# EAGLE board Controle_4_reles V2 (EAGLE 4.09)
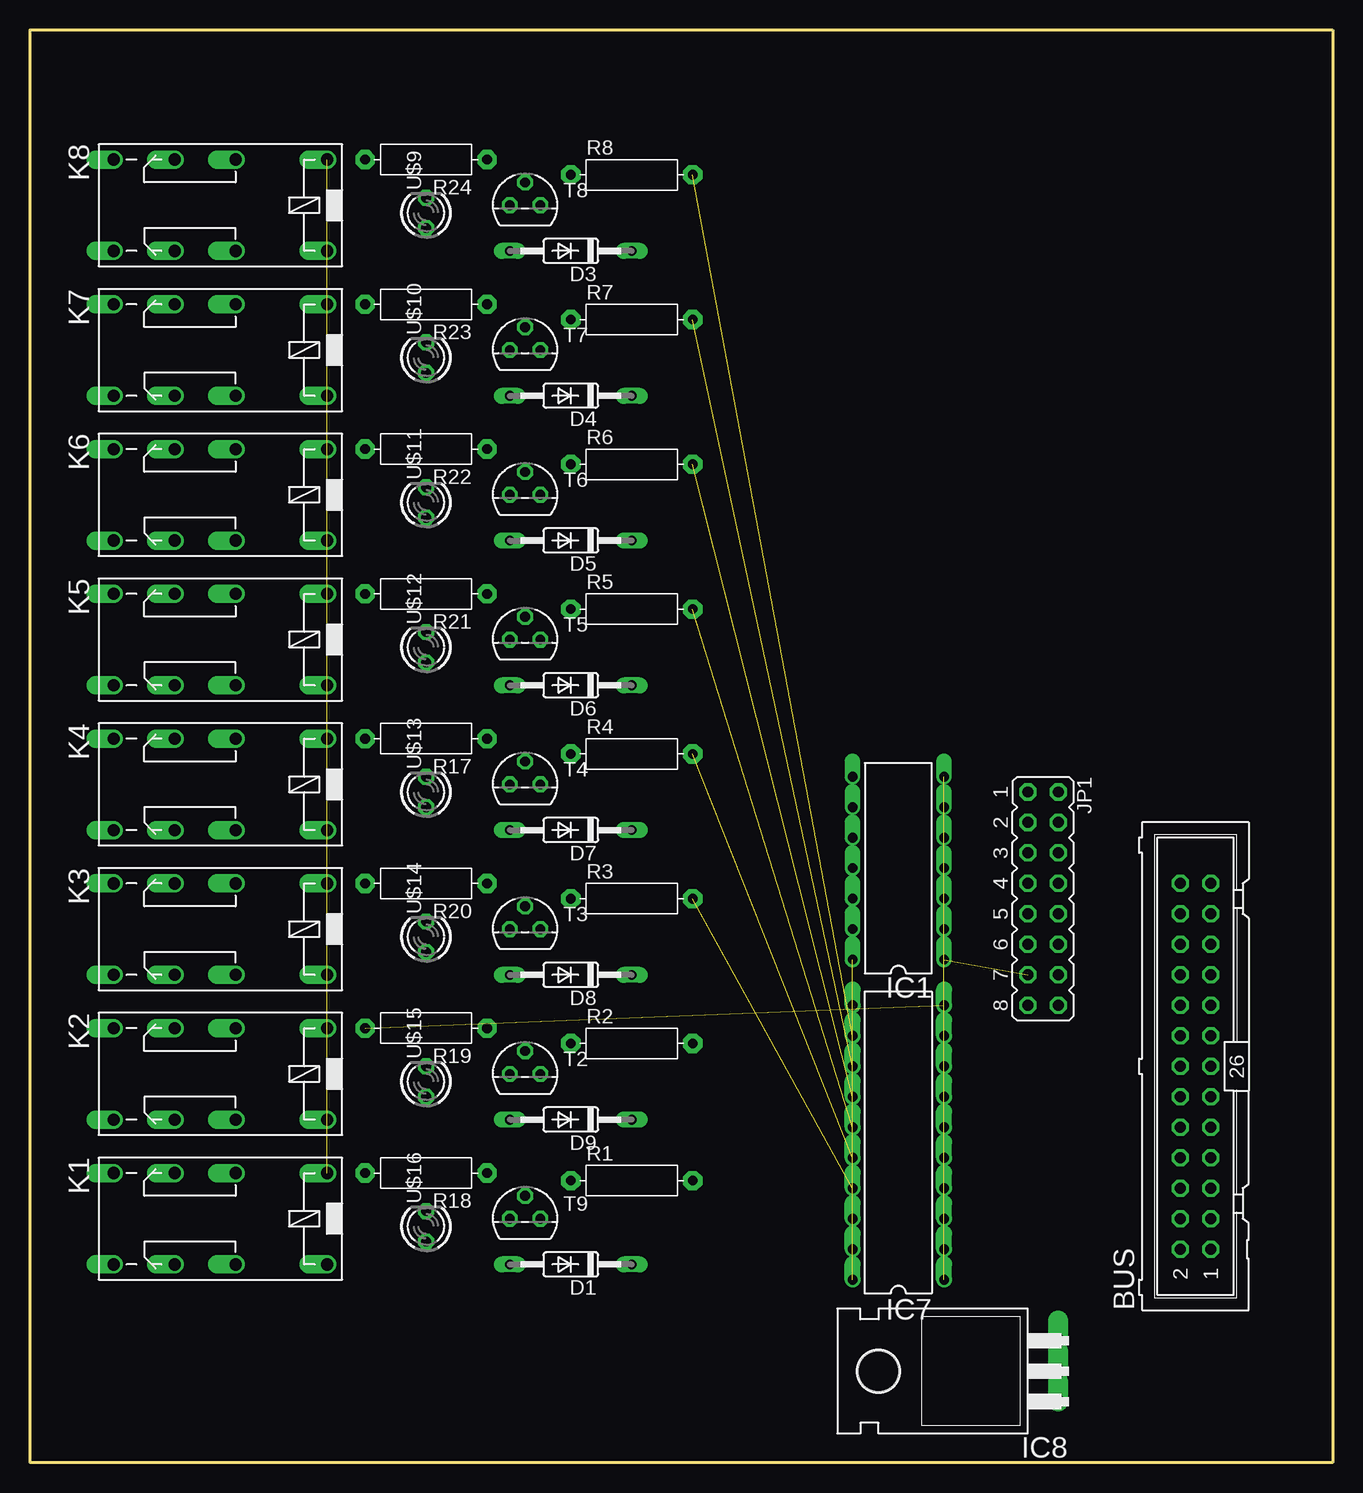
[diagram p0: board, top side]
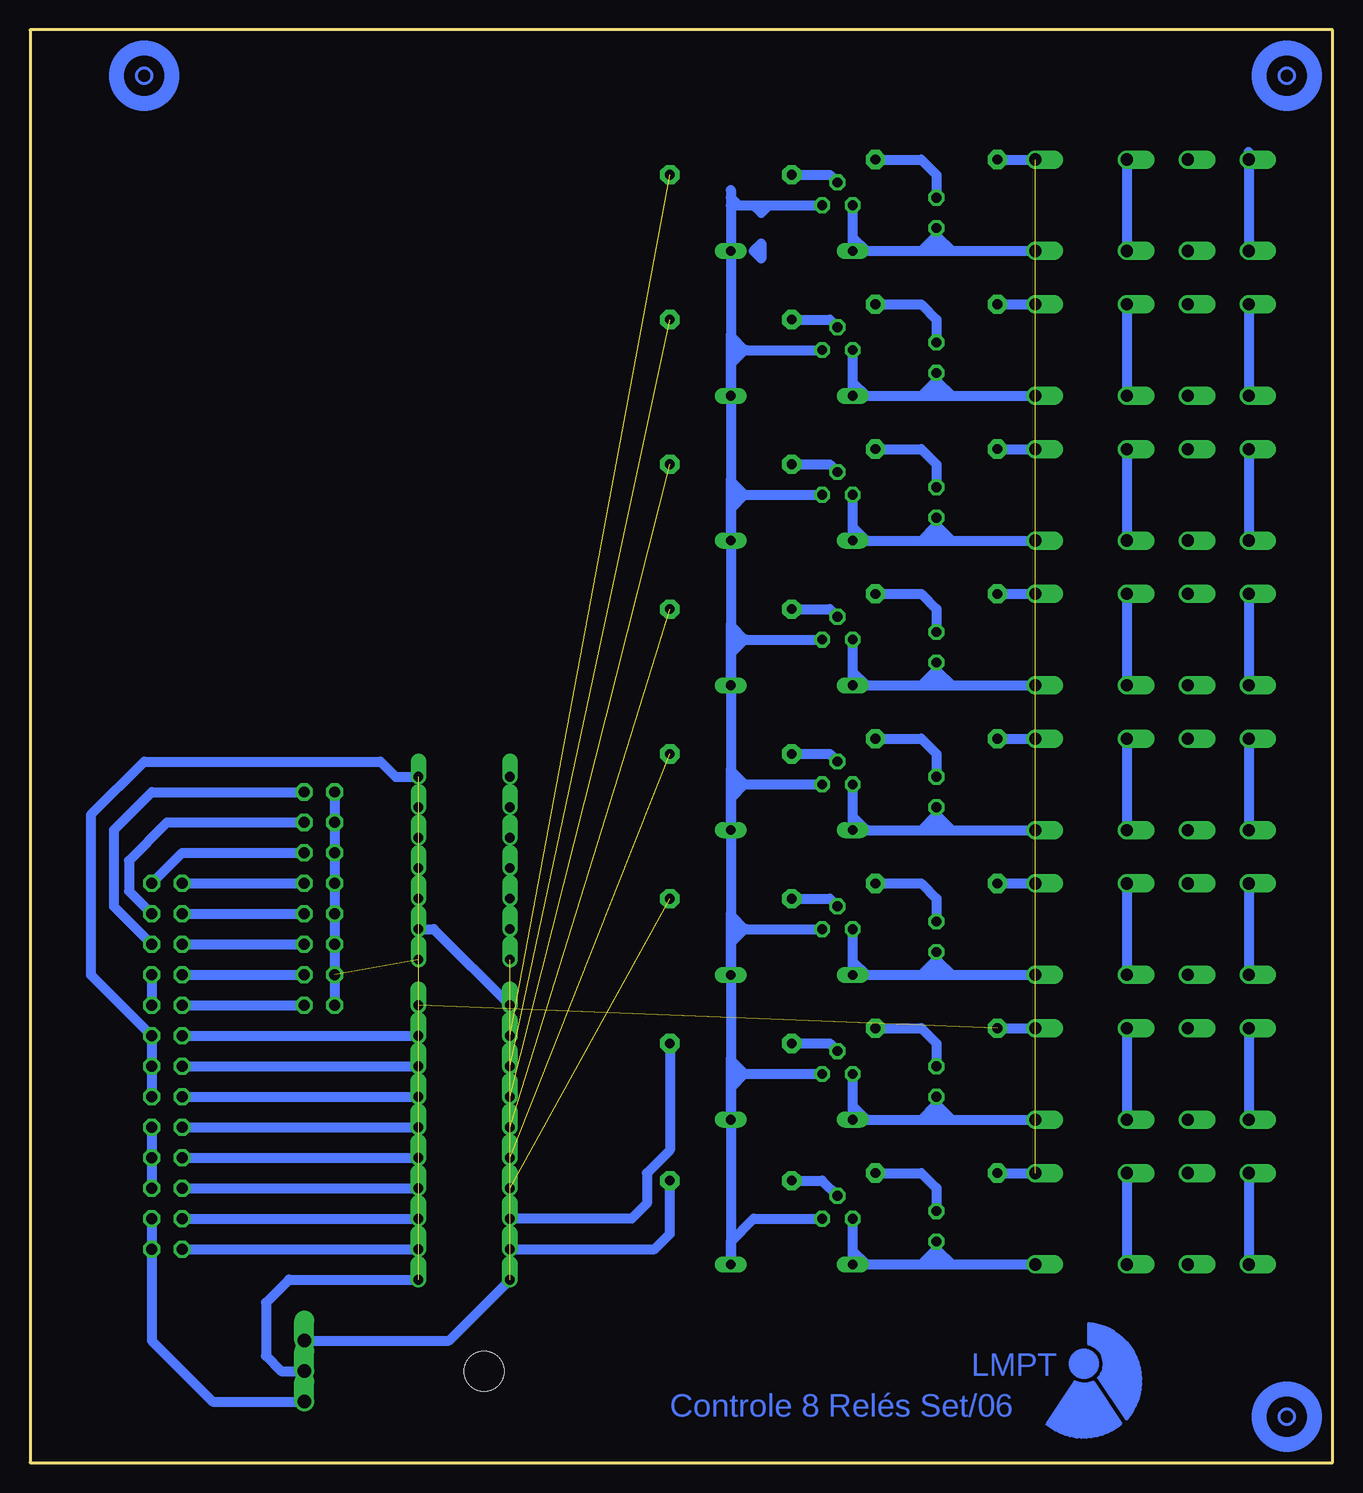
[diagram p1: board, bottom side, seen from below]

Size 108.59 x 119.38 mm. Coordinates in mm from the lower left corner, seen from the top.
Outline: 108.59,119.38 108.59,0 0,0 0,119.38 108.59,119.38
Copper layers used: Bottom

## Footprints (pad centres in the part's own frame; a part is rotated, then mirrored left to right if it is on the bottom)
ML26 = drill 0.914 octagon: 1 -15.24,-1.27; 2 -15.24,1.27; 3 -12.7,-1.27; 4 -12.7,1.27; 5 -10.16,-1.27; 6 -10.16,1.27; 7 -7.62,-1.27; 8 -7.62,1.27; 9 -5.08,-1.27; 10 -5.08,1.27; 11 -2.54,-1.27; 12 -2.54,1.27; 13 0,-1.27; 14 0,1.27; 15 2.54,-1.27; 16 2.54,1.27; 17 5.08,-1.27; 18 5.08,1.27; 19 7.62,-1.27; 20 7.62,1.27; 21 10.16,-1.27; 22 10.16,1.27; 23 12.7,-1.27; 24 12.7,1.27; 25 15.24,-1.27; 26 15.24,1.27
DO35-10 = drill 0.813 long: A 5.08,0; C -5.08,0
DIL14 = drill 0.8 offset: 1 -7.62,-3.81; 2 -5.08,-3.81; 3 -2.54,-3.81; 4 0,-3.81; 5 2.54,-3.81; 6 5.08,-3.81; 7 7.62,-3.81; 8 7.62,3.81; 9 5.08,3.81; 10 2.54,3.81; 11 0,3.81; 12 -2.54,3.81; 13 -5.08,3.81; 14 -7.62,3.81
DIL20 = drill 0.813 offset: 1 -11.43,-3.81; 2 -8.89,-3.81; 3 -6.35,-3.81; 4 -3.81,-3.81; 5 -1.27,-3.81; 6 1.27,-3.81; 7 3.81,-3.81; 8 6.35,-3.81; 9 8.89,-3.81; 10 11.43,-3.81; 11 11.43,3.81; 12 8.89,3.81; 13 6.35,3.81; 14 3.81,3.81; 15 1.27,3.81; 16 -1.27,3.81; 17 -3.81,3.81; 18 -6.35,3.81; 19 -8.89,3.81; 20 -11.43,3.81
TO220H = drill 1.118 offset: 1 -2.54,-10.16; 2 0,-10.16; 3 2.54,-10.16 | hole 3.302: 0,4.826
JP8Q = drill 0.914 octagon: 1 -8.89,-1.27; 2 -8.89,1.27; 3 -6.35,-1.27; 4 -6.35,1.27; 5 -3.81,-1.27; 6 -3.81,1.27; 7 -1.27,-1.27; 8 -1.27,1.27; 9 1.27,-1.27; 10 1.27,1.27; 11 3.81,-1.27; 12 3.81,1.27; 13 6.35,-1.27; 14 6.35,1.27; 15 8.89,-1.27; 16 8.89,1.27
351 = drill 1.016 offset: 1 -3.81,-3.81; 16 -3.81,3.81; O1 8.89,-3.81; O2 8.89,3.81; P1 3.81,-3.81; P2 3.81,3.81; S1 13.97,-3.81; S2 13.97,3.81
R-10 = drill 0.813 pad 1.6 octagon: 1 -5.08,0; 2 5.08,0
TO92 = drill 0.813 octagon: 1 1.27,0; 2 0,1.905; 3 -1.27,0
LED3MM = drill 0.813 octagon: A -1.27,0; K 1.27,0

## Placement (x,y rotation side)
BUS  [ML26]  97.16,33.02 90 top
D1  1N4148  [DO35-10]  45.09,16.51 180 top
D3  1N4148  [DO35-10]  45.09,100.97 180 top
D4  1N4148  [DO35-10]  45.09,88.9 180 top
D5  1N4148  [DO35-10]  45.09,76.83 180 top
D6  1N4148  [DO35-10]  45.09,64.77 180 top
D7  1N4148  [DO35-10]  45.09,52.7 180 top
D8  1N4148  [DO35-10]  45.09,40.64 180 top
D9  1N4148  [DO35-10]  45.09,28.58 180 top
IC1  7404N  [DIL14]  72.39,49.53 90 top
IC7  74AS573N  [DIL20]  72.39,26.67 90 top
IC8  7805T  [TO220H]  75.57,7.62 90 top
JP1  [JP8Q]  84.46,46.99 270 top
K1  351  [351]  20.96,20.32 180 top
K2  351  [351]  20.96,32.38 180 top
K3  351  [351]  20.96,44.45 180 top
K4  351  [351]  20.96,56.51 180 top
K5  351  [351]  20.96,68.58 180 top
K6  351  [351]  20.96,80.64 180 top
K7  351  [351]  20.96,92.71 180 top
K8  351  [351]  20.96,104.77 180 top
R1  1k  [R-10]  50.17,23.49 0 top
R2  1k  [R-10]  50.17,34.92 0 top
R3  1k  [R-10]  50.17,46.99 0 top
R4  1k  [R-10]  50.17,59.05 0 top
R5  1k  [R-10]  50.17,71.12 0 top
R6  1k  [R-10]  50.17,83.19 0 top
R7  1k  [R-10]  50.17,95.25 0 top
R8  1k  [R-10]  50.17,107.31 0 top
R17  500  [R-10]  33.02,60.32 180 top
R18  500  [R-10]  33.02,24.13 180 top
R19  500  [R-10]  33.02,36.19 180 top
R20  500  [R-10]  33.02,48.26 180 top
R21  500  [R-10]  33.02,72.39 180 top
R22  500  [R-10]  33.02,84.45 180 top
R23  500  [R-10]  33.02,96.52 180 top
R24  500  [R-10]  33.02,108.58 180 top
T2  BC327  [TO92]  41.28,32.38 0 top
T3  BC327  [TO92]  41.28,44.45 0 top
T4  BC327  [TO92]  41.28,56.51 0 top
T5  BC327  [TO92]  41.28,68.58 0 top
T6  BC327  [TO92]  41.28,80.64 0 top
T7  BC327  [TO92]  41.28,92.71 0 top
T8  BC327  [TO92]  41.28,104.77 0 top
T9  BC327  [TO92]  41.28,20.32 0 top
U$9  [LED3MM]  33.02,104.14 90 top
U$10  [LED3MM]  33.02,92.07 90 top
U$11  [LED3MM]  33.02,80.01 90 top
U$12  [LED3MM]  33.02,67.94 90 top
U$13  [LED3MM]  33.02,55.88 90 top
U$14  [LED3MM]  33.02,43.81 90 top
U$15  [LED3MM]  33.02,31.75 90 top
U$16  [LED3MM]  33.02,19.69 90 top

## Library data of the parts
BUS = con-harting-ml
D1 D3-D9 = diode
IC1 IC7 = 74xx-us
IC8 = linear
JP1 = jumper
K1-K8 = relay
R1-R8 R17-R24 = discrete
T2-T9 = transistor-pnp
U$9-U$16 = led

## Nets
+5V: BUS.5 BUS.7 BUS.9
+5VR1: D1.C D4.C D5.C D6.C D7.C D8.C D9.C T2.1 T3.1 T4.1 T5.1 T6.1 T7.1 T8.1 T9.1
+12V: BUS.1 BUS.3 IC8.1
-12V: BUS.17 BUS.19
ADDR0: BUS.21 JP1.2
ADDR1: BUS.23 JP1.4
ADDR2: BUS.25 JP1.6
ADDR3: BUS.26 JP1.8
ADDR4: BUS.24 JP1.10
ADDR5: BUS.22 JP1.12
ADDR6: BUS.20 JP1.14
ADDR7: BUS.18 JP1.16
N$1: K8.S1 K8.S2
N$2: R5.1 T5.2
N$3: IC7.19 R1.2
N$4: IC7.18 R2.2
N$5: K8.P1 K8.P2
N$6: IC7.16 R4.2
N$7: IC7.12 R8.2
N$8: IC7.13 R7.2
N$9: IC7.14 R6.2
N$10: R1.1 T9.2
N$12: K7.P1 K7.P2
N$13: IC7.17 R3.2
N$15: D6.A K5.16 T5.3 U$12.A
N$16: K7.S1 K7.S2
N$17: R2.1 T2.2
N$18: D1.A K1.16 T9.3 U$16.A
N$19: D9.A K2.16 T2.3 U$15.A
N$20: R6.1 T6.2
N$21: R3.1 T3.2
N$22: D8.A K3.16 T3.3 U$14.A
N$23: D5.A K6.16 T6.3 U$11.A
N$24: R4.1 T4.2
N$25: D7.A K4.16 T4.3 U$13.A
N$26: R7.1 T7.2
N$27: D4.A K7.16 T7.3 U$10.A
N$28: R8.1 T8.2
N$29: D3.A K8.16 T8.3 U$9.A
N$30: IC7.15 R5.2
N$32: K6.P1 K6.P2
N$33: IC1.1 JP1.1 JP1.3 JP1.5 JP1.7 JP1.9 JP1.11 JP1.13 JP1.15
N$34: K6.S1 K6.S2
N$35: K5.P1 K5.P2
N$36: K5.S1 K5.S2
N$37: K4.P1 K4.P2
N$38: K4.S1 K4.S2
N$39: K3.P1 K3.P2
N$40: K3.S1 K3.S2
N$41: K2.P1 K2.P2
N$42: K2.S1 K2.S2
N$43: K1.P1 K1.P2
N$44: K1.S1 K1.S2
N$51: R18.1 U$16.K
N$53: IC1.2 IC7.11
N$94: R20.1 U$14.K
N$95: R19.1 U$15.K
N$98: R17.1 U$13.K
N$150: R21.1 U$12.K
N$153: R22.1 U$11.K
N$156: R23.1 U$10.K
N$160: R24.1 U$9.K
PB0: BUS.2 IC7.2
PB1: BUS.4 IC7.3
PB2: BUS.6 IC7.4
PB3: BUS.8 IC7.5
PB4: BUS.10 IC7.6
PB5: BUS.12 IC7.7
PB6: BUS.14 IC7.8
PB7: BUS.16 IC7.9
PE: BUS.11 BUS.13 BUS.15 IC1.7 IC7.1 IC7.10 IC8.2 K1.1 K2.1 K3.1 K4.1 K5.1 K6.1 K7.1 K8.1 R17.2 R18.2 R19.2 R20.2 R21.2 R22.2 R23.2 R24.2
S$2: IC1.14 IC7.20 IC8.3

## Tracks (layer width: path | path; a pad name or v marks a point on that pad's centre or on a via)
+5V
  Bottom 0.813: BUS.5 BUS.7 BUS.9
+5VR1
  Bottom 0.61: 50.17,33.66 48.9,32.38 50.17,31.11 | 50.17,45.72 48.9,44.45 50.17,43.18 | 50.17,57.78 48.9,56.51 50.17,55.24 | 50.17,91.44 48.9,92.71 50.17,93.98 | 50.17,69.85 48.9,68.58 50.17,67.31 | 50.17,79.38 48.9,80.64 50.17,81.91
  Bottom 0.813: T9.1 48.26,20.32 50.17,18.41 D1.C 50.17,33.66 50.17,32.38 | T2.1 48.9,32.38 50.17,32.38 | 50.17,32.38 50.17,31.11 D9.C 50.17,45.72 50.17,44.45 | 46.99,104.77 T8.1 | T3.1 48.9,44.45 50.17,44.45 | 50.17,44.45 50.17,43.18 D8.C 50.17,57.78 50.17,56.51 | 47.63,104.14 46.99,104.77 | 47.63,104.77 46.99,104.77 | 47.63,104.77 47.63,104.14 | 48.26,104.77 47.63,104.77 | 48.26,104.77 47.63,104.14 | 49.53,104.77 48.26,104.77 | 49.53,104.77 50.17,105.41 50.17,106.05 | 50.17,104.77 48.26,104.77 | 50.17,104.77 49.53,104.77 | 50.17,106.05 50.17,104.77 | T4.1 48.9,56.51 50.17,56.51 | 50.17,56.51 50.17,55.24 D7.C 50.17,69.85 50.17,68.58 | 50.17,106.05 D4.C | D4.C 50.17,91.44 50.17,92.71 | 50.17,92.71 48.9,92.71 T7.1 50.17,92.71 | D4.C 50.17,92.71 | 50.17,92.71 50.17,93.98 D5.C 50.17,79.38 50.17,80.64 | T5.1 48.9,68.58 50.17,68.58 | 50.17,68.58 50.17,67.31 D6.C 50.17,81.91 50.17,80.64 | T6.1 48.9,80.64 50.17,80.64
+12V
  Bottom 0.813: BUS.3 BUS.1 98.43,10.16 93.34,5.08 IC8.1
-12V
  Bottom 0.813: BUS.19 BUS.17
ADDR0
  Bottom 0.813: BUS.21 101.6,46.35 101.6,52.7 98.43,55.88 JP1.2
ADDR1
  Bottom 0.813: JP1.4 97.16,53.34 100.33,50.16 100.33,47.62 BUS.23
ADDR2
  Bottom 0.813: JP1.6 95.89,50.8 BUS.25
ADDR3
  Bottom 0.813: BUS.26 JP1.8
ADDR4
  Bottom 0.813: BUS.24 JP1.10
ADDR5
  Bottom 0.813: BUS.22 JP1.12
ADDR6
  Bottom 0.813: BUS.20 JP1.14
ADDR7
  Bottom 0.813: BUS.18 JP1.16
N$1
  Bottom 0.813: K8.S2 K8.S1 6.99,109.22
N$2
  Bottom 0.813: R5.1 41.91,71.12 T5.2
N$3
  Bottom 0.813: R1.2 55.25,19.05 56.52,17.78 IC7.19
N$4
  Bottom 0.813: R2.2 55.25,26.03 57.15,24.13 57.15,21.59 58.42,20.32 IC7.18
N$5
  Bottom 0.813: K8.P1 K8.P2
N$6  (1 unrouted)
N$7  (1 unrouted)
N$8  (1 unrouted)
N$9  (1 unrouted)
N$10
  Bottom 0.813: R1.1 42.55,23.49 T9.2
N$11
  Bottom 0.254: 20.36,11.6 20.36,9.88
N$12
  Bottom 0.813: K7.P1 K7.P2
N$13  (1 unrouted)
N$15
  Bottom 0.61: 40.01,66.04 38.74,64.77
  Bottom 0.813: T5.3 40.01,66.04 D6.A 38.74,64.77 34.29,64.77 | 34.29,64.77 33.02,64.77 | 33.02,64.77 31.75,64.77 | 31.75,64.77 K5.16 | 33.02,66.04 U$12.A | 33.02,64.77 33.02,66.04 | 34.29,64.77 33.02,66.04 | 33.02,66.04 31.75,64.77
N$16
  Bottom 0.813: K7.S1 K7.S2
N$17
  Bottom 0.813: R2.1 41.91,34.92 T2.2
N$18
  Bottom 0.61: 40.01,17.78 38.74,16.51
  Bottom 0.813: T9.3 40.01,17.78 D1.A 38.74,16.51 34.29,16.51 | 31.75,16.51 K1.16 | 33.02,16.51 31.75,16.51 | 34.29,16.51 33.02,16.51 | 33.02,17.78 U$16.A | 33.02,16.51 33.02,17.78 | 34.29,16.51 33.02,17.78 | 33.02,17.78 31.75,16.51
N$19
  Bottom 0.61: 40.01,29.84 38.74,28.58
  Bottom 0.813: T2.3 40.01,29.84 D9.A 38.74,28.58 34.29,28.58 | 31.75,28.58 K2.16 | 33.02,28.58 31.75,28.58 | 34.29,28.58 33.02,28.58 | 33.02,29.84 U$15.A | 33.02,28.58 33.02,29.84 | 34.29,28.58 33.02,29.84 | 33.02,29.84 31.75,28.58
N$20
  Bottom 0.813: R6.1 41.91,83.19 T6.2
N$21
  Bottom 0.813: R3.1 41.91,46.99 T3.2
N$22
  Bottom 0.61: 40.01,41.91 38.74,40.64
  Bottom 0.813: T3.3 40.01,41.91 D8.A 38.74,40.64 34.29,40.64 | 31.75,40.64 K3.16 | 33.02,40.64 31.75,40.64 | 34.29,40.64 33.02,40.64 | 33.02,41.91 U$14.A | 33.02,40.64 33.02,41.91 | 34.29,40.64 33.02,41.91 | 33.02,41.91 31.75,40.64
N$23
  Bottom 0.61: 40.01,78.1 38.74,76.83
  Bottom 0.813: 34.29,76.83 38.74,76.83 D5.A 40.01,78.1 T6.3 | 34.29,76.83 33.02,76.83 | 33.02,76.83 31.75,76.83 | 31.75,76.83 K6.16 | 33.02,78.1 U$11.A | 33.02,76.83 33.02,78.1 | 34.29,76.83 33.02,78.1 | 33.02,78.1 31.75,76.83
N$24
  Bottom 0.813: R4.1 41.91,59.05 T4.2
N$25
  Bottom 0.61: 40.01,53.97 38.74,52.7
  Bottom 0.813: T4.3 40.01,53.97 D7.A 38.74,52.7 34.29,52.7 | 31.75,52.7 K4.16 | 33.02,52.7 31.75,52.7 | 34.29,52.7 33.02,52.7 | 33.02,53.97 U$13.A | 33.02,52.7 33.02,53.97 | 34.29,52.7 33.02,53.97 | 33.02,53.97 31.75,52.7
N$26
  Bottom 0.813: R7.1 41.91,95.25 T7.2
N$27
  Bottom 0.61: 40.01,90.17 38.74,88.9
  Bottom 0.813: T7.3 40.01,90.17 D4.A 38.74,88.9 34.29,88.9 | 34.29,88.9 33.02,88.9 | 33.02,88.9 31.75,88.9 | 31.75,88.9 K7.16 | 33.02,90.17 U$10.A | 33.02,88.9 33.02,90.17 | 34.29,88.9 33.02,90.17 | 33.02,90.17 31.75,88.9
N$28
  Bottom 0.813: R8.1 41.91,107.31 T8.2
N$29
  Bottom 0.61: 40.01,102.23 38.74,100.97
  Bottom 0.813: T8.3 40.01,102.23 D3.A 38.74,100.97 34.29,100.97 | 34.29,100.97 33.02,100.97 | 33.02,100.97 31.75,100.97 | 31.75,100.97 K8.16 | 33.02,102.23 U$9.A | 33.02,100.97 33.02,102.23 | 34.29,100.97 33.02,102.23 | 33.02,102.23 31.75,100.97
N$30  (1 unrouted)
N$32
  Bottom 0.813: K6.P1 K6.P2
N$33  (1 unrouted)
  Bottom 0.813: JP1.1 JP1.3 JP1.5 JP1.7 JP1.9 JP1.11 JP1.13 JP1.15
N$34
  Bottom 0.813: K6.S1 K6.S2
N$35
  Bottom 0.813: K5.P1 K5.P2
N$36
  Bottom 0.813: K5.S1 K5.S2
N$37
  Bottom 0.813: K4.P1 K4.P2
N$38
  Bottom 0.813: K4.S1 K4.S2
N$39
  Bottom 0.813: K3.P1 K3.P2
N$40
  Bottom 0.813: K3.S1 K3.S2
N$41
  Bottom 0.813: K2.P1 K2.P2
N$42
  Bottom 0.813: K2.S1 K2.S2
N$43
  Bottom 0.813: K1.P1 K1.P2
N$44
  Bottom 0.813: K1.S1 K1.S2
N$51
  Bottom 0.813: U$16.K 33.02,22.86 34.29,24.13 R18.1
N$53
  Bottom 0.813: IC1.2 74.93,44.45 IC7.11
N$59
  Bottom 0.254: 19.48,7.05 17.21,3.65
N$94
  Bottom 0.813: U$14.K 33.02,46.99 34.29,48.26 R20.1
N$95
  Bottom 0.813: U$15.K 33.02,34.92 34.29,36.19 R19.1
N$98
  Bottom 0.813: U$13.K 33.02,59.05 34.29,60.32 R17.1
N$128
  Bottom 0.254: 19.96,6.7 17.66,3.25
N$130
  Bottom 0.254: 23.76,3.22 21.48,6.7
N$138
  Bottom 0.61: 18.07,3.27 20.08,6.37 20.68,6.16 18.47,3.02 19.59,2.55 21.27,2.33 22.41,2.61 23.4,3.27 21.32,6.29 20.95,6.26 19.14,3.03 21.34,2.71 22.92,3.49 21.05,6.09 19.86,3.02 22.53,3.69 21.17,5.42 20.46,3.23 22.04,3.91 21.22,4.69 21.15,3.75 21.31,2.67
N$147
  Bottom 0.61: 17.13,4.13 16.3,5.86 16.26,7.2 16.56,8.48 16.99,9.34 17.85,10.18 18.88,10.94 20.12,11.28 19.97,10.08 18.94,9.24 18.74,8.08 18.86,7.58 19.11,7.03 17.39,4.51 16.95,5.28 17.28,5.31 18.67,7.33 18.44,7.8 16.75,5.51 16.76,8.51 18.9,10.73 19.85,10.59 19.17,9.83 19,10.39 18.6,9.47 17.89,9.33 18.57,8.85 17.46,8.9 18.51,8.21 17.06,8.52 18.17,7.81 16.95,7.94 17.74,7.42 17.08,7.18 17.26,6.56
N$150
  Bottom 0.813: U$12.K 33.02,71.12 34.29,72.39 R21.1
N$153
  Bottom 0.813: U$11.K 33.02,83.19 34.29,84.45 R22.1
N$156
  Bottom 0.813: U$10.K 33.02,95.25 34.29,96.52 R23.1
N$160
  Bottom 0.813: U$9.K 33.02,107.31 34.29,108.58 R24.1
PB0
  Bottom 0.813: BUS.2 IC7.2
PB1
  Bottom 0.813: BUS.4 IC7.3
PB2
  Bottom 0.813: BUS.6 IC7.4
PB3
  Bottom 0.813: BUS.8 IC7.5
PB4
  Bottom 0.813: BUS.10 IC7.6
PB5
  Bottom 0.813: BUS.12 IC7.7
PB6
  Bottom 0.813: BUS.14 IC7.8
PB7
  Bottom 0.813: BUS.16 IC7.9
PE  (10 unrouted)
  Bottom 0.813: R24.2 K8.1 | R23.2 K7.1 | R22.2 K6.1 | R21.2 K5.1 | R17.2 K4.1 | R20.2 K3.1 | R19.2 K2.1 | R18.2 K1.1 | BUS.11 BUS.13 BUS.15 103.51,40.64 103.51,53.97 99.06,58.42 79.38,58.42 78.11,57.15 IC1.7 | IC7.1 87,15.24 88.9,13.33 88.9,8.89 87.63,7.62 IC8.2
S$2  (1 unrouted)
  Bottom 0.813: IC7.20 73.66,10.16 IC8.3
S$3
  Bottom 0.813: 48.26,100.97 47.63,100.33 | 47.63,100.97 47.63,100.33 | 47.63,100.97 48.26,100.97 | 47.63,101.6 47.63,100.97 | 47.63,101.6 48.26,100.97 | 47.63,101.6 47.63,100.33
(copper drawn outside any net)
  Bottom 0.254: 19.58,6.97 arc-125 20.36,9.88 | 19.93,6.72 arc58 21.58,6.77 | 17.21,3.62 arc-128 20.38,11.58 | 17.63,3.25 arc82 23.86,3.25
  shapes: Bottom circle x10

## Text on the board
Bottom: LMPT | Controle 8 Relés Set/06